# EAGLE board schematic (EAGLE 8.6.0)
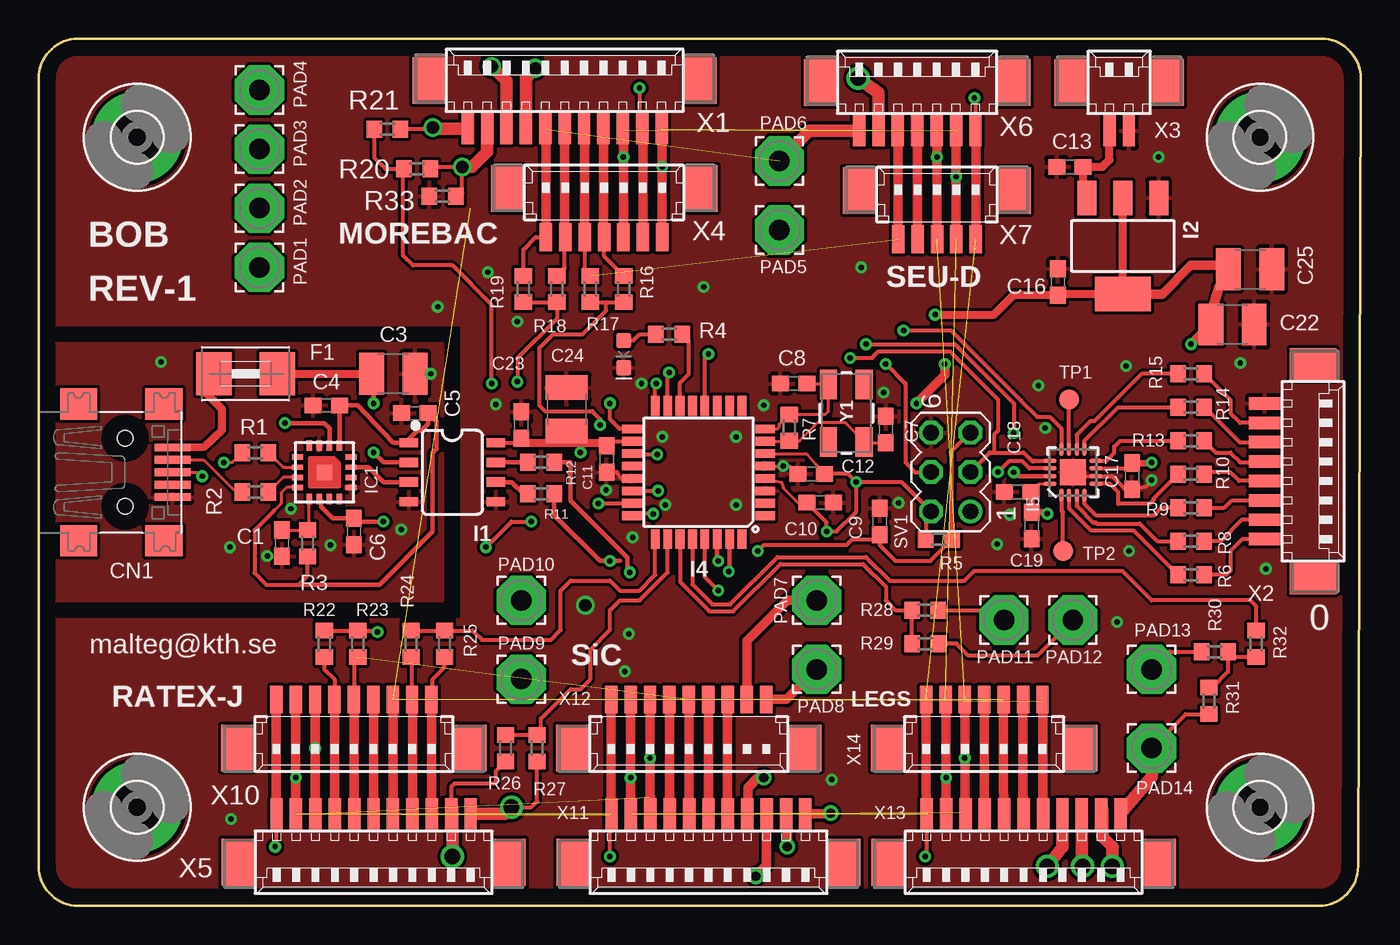
[diagram p0: board, top side]
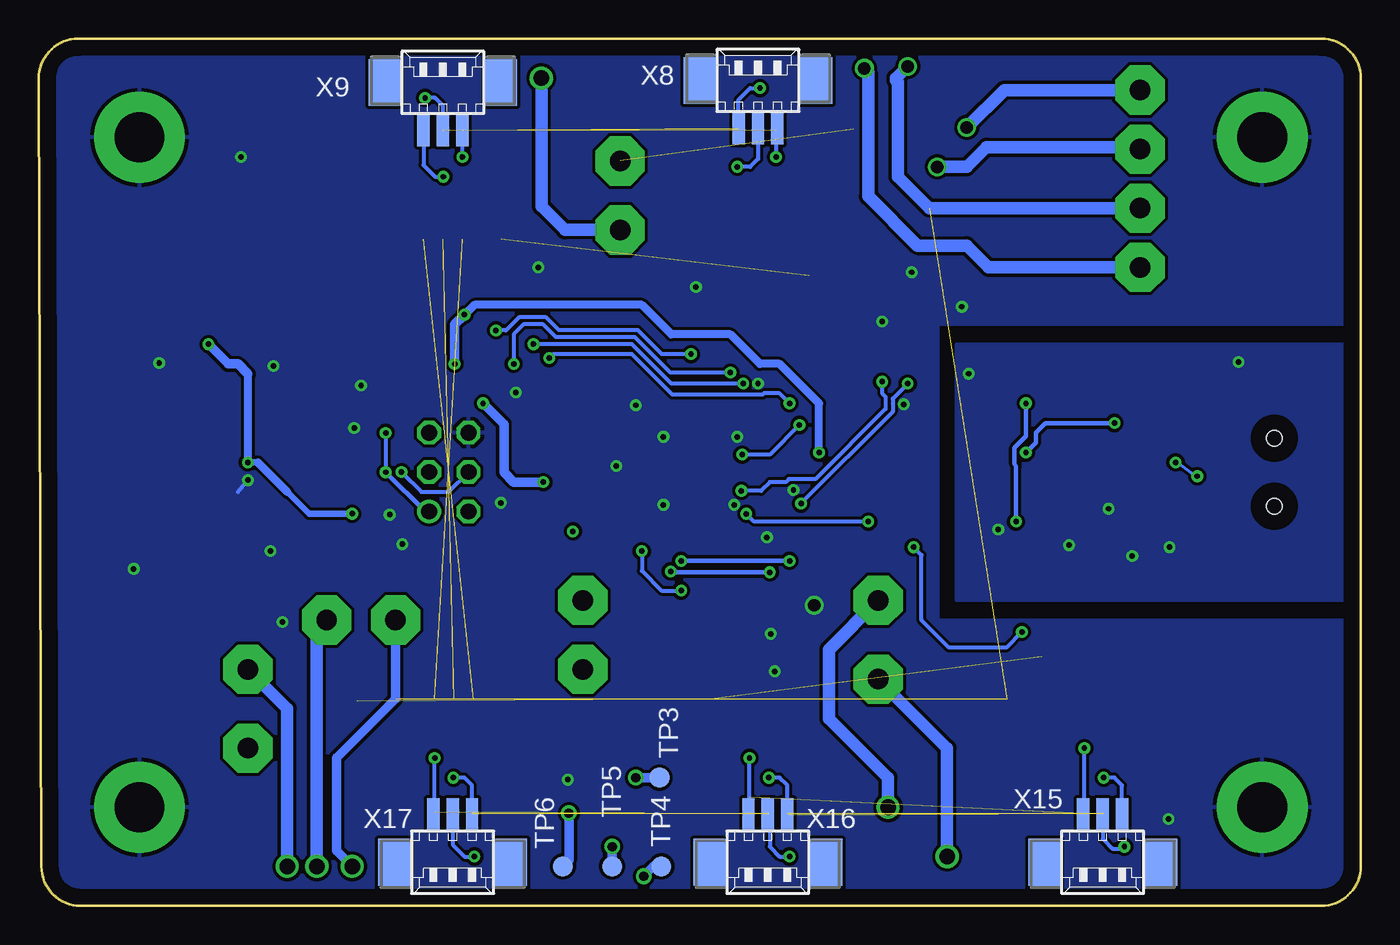
[diagram p1: board, bottom side, seen from below]

Size 85.24 x 55.88 mm. Coordinates in mm from the lower left corner, seen from the top.
Outline: 85.23,53.33 85.07,2.53 arc-90 82.53,0 2.54,0 arc-90 0,2.54 0,53.34 arc-90 2.54,55.88 82.69,55.88 arc-90 85.23,53.33
Copper layers (1*16): Top 0.035mm / dielectric 1.5mm / Bottom 0.035mm
Design rules "default *": minimum track width 7mil, minimum drill 12mil, track to track 8mil, track to pad 8mil, pad to pad 8mil, via to via 8mil, smd to smd 8mil, copper to edge 40mil, drill to drill 8mil, minimum pad ring 10mil, minimum via ring 8mil, stop-mask expansion 4mil, vias tented up to drill 0.6mm, thermal gap 10mil

## Footprints (pad centres in the part's own frame; a part is rotated, then mirrored left to right if it is on the bottom)
C0603 = smd 1.1 x 1: 1 -0.85,0; 2 0.85,0
C3225 = smd 1.6 x 2.7: 1 -1.4,0; 2 1.4,0
USB-MINIB = smd 0.5 x 2.308: D+ 0,4.064; D- -0.8,4.064; GND 1.6,4.064; ID 0.8,4.064; VBUS -1.6,4.064 | smd 2 x 2.4: GND1 -4.4,-2; GND2 -4.4,3.5; GND3 4.4,3.5; GND4 4.4,-2 | hole 1: -2.2,1; 2.2,1
LED-0603 = smd 1 x 1: A -0.877,0; C 0.877,0
1812 = smd 2.286 x 2.794: 1 -2.046,0; 2 2.046,0
3,2-PAD = drill 3.2 pad 5.842: B3,2 0,0
SO08 = smd 0.6 x 1.2: 1 -1.905,-2.8; 2 -0.635,-2.8; 3 0.635,-2.8; 4 1.905,-2.8; 5 1.905,2.8; 6 0.635,2.8; 7 -0.635,2.8; 8 -1.905,2.8
SOT223 = smd 1.219 x 2.235: 1 -2.311,-3.099; 2 0,-3.099; 3 2.311,-3.099 | smd 3.6 x 2.2: 2*2 0,3.099
TQFP32-08 = smd 1.27 x 0.559: 1 -4.293,2.8; 2 -4.293,2; 3 -4.293,1.2; 4 -4.293,0.4; 5 -4.293,-0.4; 6 -4.293,-1.2; 7 -4.293,-2; 8 -4.293,-2.8; 17 4.293,-2.8; 18 4.293,-2; 19 4.293,-1.2; 20 4.293,-0.4; 21 4.293,0.4; 22 4.293,1.2; 23 4.293,2; 24 4.293,2.8 | smd 0.559 x 1.27: 9 -2.8,-4.293; 10 -2,-4.293; 11 -1.2,-4.293; 12 -0.4,-4.293; 13 0.4,-4.293; 14 1.2,-4.293; 15 2,-4.293; 16 2.8,-4.293; 25 2.8,4.293; 26 2,4.293; 27 1.2,4.293; 28 0.4,4.293; 29 -0.4,4.293; 30 -1.2,4.293; 31 -2,4.293; 32 -2.8,4.293
QFN16-3X3MM = smd 0.85 x 0.28: 1 -1.475,0.75; 2 -1.475,0.25; 3 -1.475,-0.25; 4 -1.475,-0.75; 9 1.475,-0.75; 10 1.475,-0.25; 11 1.475,0.25; 12 1.475,0.75 | smd 0.28 x 0.85: 5 -0.75,-1.475; 6 -0.25,-1.475; 7 0.25,-1.475; 8 0.75,-1.475; 13 0.75,1.475; 14 0.25,1.475; 15 -0.25,1.475; 16 -0.75,1.475 | smd 1.68 x 1.68: EXT 0,0
QFN16 = smd 0.7 x 0.35: 1 -1.725,0.975; 2 -1.725,0.325; 3 -1.725,-0.325; 4 -1.725,-0.975; 9 1.725,-0.975; 10 1.725,-0.325; 11 1.725,0.325; 12 1.725,0.975 | smd 0.35 x 0.7: 5 -0.975,-1.725; 6 -0.325,-1.725; 7 0.325,-1.725; 8 0.975,-1.725; 13 0.975,1.725; 14 0.325,1.725; 15 -0.325,1.725; 16 -0.975,1.725 | smd 1 x 1: TAB 0,0
3,17/1,3 = drill 1.321 pad 3.175 octagon: 1 0,0
R0603 = smd 1 x 1.1: 1 -0.85,0; 2 0.85,0
MA03-2 = drill 1.016: 1 -2.54,-1.27 | drill 1.016 octagon: 2 -2.54,1.27; 3 0,-1.27; 4 0,1.27; 5 2.54,-1.27; 6 2.54,1.27
TP13R = smd 1.3 x 1.3: TP 0,0
53261-11 = smd 0.8 x 2: 1 6.25,-2.5; 2 5,-2.5; 3 3.75,-2.5; 4 2.5,-2.5; 5 1.25,-2.5; 6 0,-2.5; 7 -1.25,-2.5; 8 -2.5,-2.5; 9 -3.75,-2.5; 10 -5,-2.5; 11 -6.25,-2.5 | smd 2.1 x 3: S1 8.75,0.625; S2 -8.75,0.625
53261-08 = smd 0.8 x 2: 1 4.375,-2.5; 2 3.125,-2.5; 3 1.875,-2.5; 4 0.625,-2.5; 5 -0.625,-2.5; 6 -1.875,-2.5; 7 -3.125,-2.5; 8 -4.375,-2.5 | smd 2.1 x 3: S1 6.875,0.625; S2 -6.875,0.625
53261-02 = smd 0.8 x 2: 1 0.625,-2.5; 2 -0.625,-2.5 | smd 2.1 x 3: S1 3.125,0.625; S2 -3.125,0.625
53398-07 = smd 0.8 x 1.8: 1 3.75,-2.5; 2 2.5,-2.5; 3 1.25,-2.5; 4 0,-2.5; 5 -1.25,-2.5; 6 -2.5,-2.5; 7 -3.75,-2.5 | smd 2.1 x 3: S1 6.25,0.625; S2 -6.25,0.625
53261-07 = smd 0.8 x 2: 1 3.75,-2.5; 2 2.5,-2.5; 3 1.25,-2.5; 4 0,-2.5; 5 -1.25,-2.5; 6 -2.5,-2.5; 7 -3.75,-2.5 | smd 2.1 x 3: S1 6.25,0.625; S2 -6.25,0.625
53398-05 = smd 0.8 x 1.8: 1 2.5,-2.5; 2 1.25,-2.5; 3 0,-2.5; 4 -1.25,-2.5; 5 -2.5,-2.5 | smd 2.1 x 3: S1 5,0.625; S2 -5,0.625
53261-03 = smd 0.8 x 2: 1 1.25,-2.5; 2 0,-2.5; 3 -1.25,-2.5 | smd 2.1 x 3: S1 3.75,0.625; S2 -3.75,0.625
53398-09 = smd 0.8 x 1.8: 1 5,-2.5; 2 3.75,-2.5; 3 2.5,-2.5; 4 1.25,-2.5; 5 0,-2.5; 6 -1.25,-2.5; 7 -2.5,-2.5; 8 -3.75,-2.5; 9 -5,-2.5 | smd 2.1 x 3: S1 7.5,0.625; S2 -7.5,0.625
CRYSTAL-SMD-5X3.2-4PAD = smd 1.9 x 1.1: 1 -1.85,-1.15; 2 1.85,-1.15; 3 1.85,1.15; 4 -1.85,1.15

## Placement (x,y rotation side)
C1  [C0603]  15.68,23.37 270 top
C3  1u  [C3225]  22.86,34.29 0 top
C4  100n  [C0603]  18.54,32.26 180 top
C5  1u  [C0603]  24.26,31.75 180 top
C6  10n  [C0603]  20.32,24.13 270 top
C7  22pF  [C0603]  54.61,30.7 270 top
C8  22pF  [C0603]  48.68,33.66 0 top
C9  [C0603]  54.23,24.77 90 top
C10  [C0603]  50.38,25.98 0 top
C11  [C0603]  36.62,28.8 270 top
C12  [C0603]  49.81,27.84 180 top
C13  [C0603]  66.48,47.62 180 top
C16  [C0603]  65.71,40.2 90 top
C17  [C0603]  70.48,27.69 270 top
C18  [C0603]  63.12,26.67 180 top
C19  [C0603]  64.01,24.51 270 top
C22  1u  [C3225]  76.96,37.47 0 top
C23  [C0603]  31.11,30.99 90 top
C24  1u  [C3225]  34.04,32 90 top
C25  1u  [C3225]  78.11,41.02 0 top
CN1  [USB-MINIB]  4.57,27.94 270 top
D1  [LED-0603]  37.72,35.56 270 top
F1  [1812]  13.34,34.29 0 top
H1  MOUNT-PAD-ROUND3.2  [3,2-PAD]  78.74,49.53 0 top
H2  MOUNT-PAD-ROUND3.2  [3,2-PAD]  6.35,6.35 0 top
H3  MOUNT-PAD-ROUND3.2  [3,2-PAD]  6.35,49.53 0 top
H4  MOUNT-PAD-ROUND3.2  [3,2-PAD]  78.74,6.35 0 top
I1  ADUM1201ARZ  [SO08]  26.67,27.94 270 top
I2  LDL1117S33R  [SOT223]  69.9,42.53 180 top
I4  ATMEGA328PCORRECT  [TQFP32-08]  42.55,27.94 180 top
I5  DAC70508MRTET  [QFN16-3X3MM]  66.67,27.94 90 top
IC1  FT230XQ  [QFN16]  18.41,27.94 270 top
PAD1  [3,17/1,3]  14.22,41.15 0 top
PAD2  [3,17/1,3]  14.22,44.96 0 top
PAD3  [3,17/1,3]  14.22,48.77 0 top
PAD4  [3,17/1,3]  14.22,52.58 0 top
PAD5  [3,17/1,3]  47.75,43.56 0 top
PAD6  [3,17/1,3]  47.75,48.01 0 top
PAD7  [3,17/1,3]  50.16,19.68 0 top
PAD8  [3,17/1,3]  50.16,15.24 0 top
PAD9  [3,17/1,3]  31.11,14.61 0 top
PAD10  [3,17/1,3]  31.11,19.68 0 top
PAD11  [3,17/1,3]  62.23,18.41 0 top
PAD12  [3,17/1,3]  66.67,18.41 0 top
PAD13  [3,17/1,3]  71.75,15.24 0 top
PAD14  [3,17/1,3]  71.75,10.16 0 top
R1  27  [R0603]  13.97,29.21 0 top
R2  27  [R0603]  13.97,26.67 0 top
R3  27  [R0603]  17.34,23.37 270 top
R4  27  [R0603]  40.64,36.83 0 top
R5  27  [R0603]  58.04,23.62 180 top
R6  27  [R0603]  74.3,21.34 180 top
R7  27  [R0603]  48.39,30.82 270 top
R8  27  [R0603]  74.3,23.5 180 top
R9  27  [R0603]  74.3,25.65 180 top
R10  27  [R0603]  74.3,27.81 180 top
R11  1k  [R0603]  32.38,26.54 0 top
R12  1k  [R0603]  32.38,28.57 0 top
R13  27  [R0603]  74.3,29.97 180 top
R14  27  [R0603]  74.3,32.13 180 top
R15  27  [R0603]  74.3,34.29 180 top
R16  1k  [R0603]  37.72,39.75 90 top
R17  1k  [R0603]  35.56,39.75 90 top
R18  1k  [R0603]  33.4,39.75 90 top
R19  1k  [R0603]  31.24,39.75 90 top
R20  1k  [R0603]  24.38,47.5 0 top
R21  1k  [R0603]  22.48,50.04 0 top
R22  1k  [R0603]  18.41,16.89 270 top
R23  1k  [R0603]  20.57,16.89 270 top
R24  1k  [R0603]  24,16.89 270 top
R25  1k  [R0603]  26.16,16.89 270 top
R26  1k  [R0603]  30.1,10.16 270 top
R27  1k  [R0603]  32.13,10.16 270 top
R28  1k  [R0603]  57.15,19.05 0 top
R29  1k  [R0603]  57.15,16.89 0 top
R30  1k  [R0603]  75.82,16.38 180 top
R31  1k  [R0603]  75.44,13.21 270 top
R32  1k  [R0603]  78.49,16.89 270 top
R33  1k  [R0603]  26.04,45.72 180 top
SV1  [MA03-2]  58.8,27.95 90 top
TP1  TPTP13R  [TP13R]  66.42,32.64 0 top
TP2  TPTP13R  [TP13R]  66.04,22.86 0 top
TP3  TPTP13R  [TP13R]  45.21,8.26 0 bottom
TP4  TPTP13R  [TP13R]  45.09,2.54 0 bottom
TP5  TPTP13R  [TP13R]  48.26,2.54 0 bottom
TP6  TPTP13R  [TP13R]  51.44,2.54 0 bottom
X1  53261-11  [53261-11]  33.91,52.58 0 top
X2  53261-08  [53261-08]  81.53,28 270 top
X3  53261-02  [53261-02]  69.66,52.45 0 top
X4  53398-07  [53398-07]  36.45,45.59 0 top
X5  53261-11  [53261-11]  21.59,3.43 180 top
X6  53261-07  [53261-07]  56.64,52.45 0 top
X7  53398-05  [53398-05]  57.91,45.47 0 top
X8  53261-03  [53261-03]  38.86,52.58 0 bottom
X9  53261-03  [53261-03]  59.18,52.45 0 bottom
X10  53398-09  [53398-09]  20.32,10.79 180 top
X11  53261-11  [53261-11]  43.18,3.43 180 top
X12  53398-09  [53398-09]  41.91,10.79 180 top
X13  53261-11  [53261-11]  63.5,3.43 180 top
X14  53398-07  [53398-07]  60.96,10.79 180 top
X15  53261-03  [53261-03]  16.64,3.43 180 bottom
X16  53261-03  [53261-03]  38.23,3.43 180 bottom
X17  53261-03  [53261-03]  58.55,3.43 180 bottom
Y1  16MHz  [CRYSTAL-SMD-5X3.2-4PAD]  52.07,31.75 270 top

## Library data of the parts
C1 C3-C13 C16-C19 C22-C25 = rcl; SPICEPREFIX: C
CN1 F1 = adafruit
D1 = SparkFun-LED
H1-H4 = holes
I1 I2 I4 I5 = MIST_libraries
IC1 = ftdichip
PAD1-PAD14 = wirepad
R1-R33 = resistor
SV1 = con-lstb; OC_FARNELL: unknown; OC_NEWARK: unknown
TP1-TP6 = testpad
X1 X5 X11 X13 = con-molex; MF: MOLEX; MPN: 53261-1171; OC_FARNELL: 1756926; OC_NEWARK: 58K8238
X2 = con-molex; MF: MOLEX; OC_FARNELL: 1125376; OC_NEWARK: unknown
X3 = con-molex; MF: MOLEX; OC_FARNELL: 1125373; OC_NEWARK: unknown
X4 X14 = con-molex; MF: MOLEX; OC_FARNELL: 9786368; OC_NEWARK: unknown
X6 = con-molex; MF: MOLEX; OC_FARNELL: 1125361; OC_NEWARK: unknown
X7 = con-molex; MF: MOLEX; OC_FARNELL: 1125354; OC_NEWARK: unknown
X8 X9 X15-X17 = con-molex; MF: MOLEX; MPN: 53261-0390; OC_FARNELL: 1125359; OC_NEWARK: 57H5006
X10 X12 = con-molex; MF: MOLEX; OC_FARNELL: unknown; OC_NEWARK: unknown
Y1 = SparkFun-Clocks; PROD_ID: XTAL-08218; SF_ID: COM-00094

## Nets
3V3CUBES: R23.2 X5.5 X10.5 X11.5 X12.5 X13.5 X14.5
3V3CUBES_DIV: I4.24 R22.1 R23.1
3V3SEUD: PAD6.1 R19.2 X1.7 X4.7 X6.7
3V3SEUD_DIV: I4.22 R18.1 R19.1
5V_LEGS: TP4.TP X11.9
5V_LEGS_DIV: I4.27 R28.1 R29.1
5VMORE: PAD4.1 R21.2 X1.11
5VMORE_DIV: I4.23 R20.1 R21.1
5VRATEX: PAD10.1 R27.2 X5.11
5VRATEX_DIV: I4.26 R26.1 R27.1
5VSIC: R25.2 X5.9 X10.9
5VSIC_DIV: I4.25 R24.1 R25.1
48VLEGS: TP6.TP X11.11
48VLEGS_DIV: I4.28 R32.1
48VLEGS_DIV_D: R30.1 R31.1 R32.2
BATTERY: C13.1 I2.3 X3.2
CRYSTAL_0: C7.2 I4.7 R7.2 Y1.3
CRYSTAL_1: C8.2 I4.8 R7.1 Y1.1
CS_DAC: I4.12 I5.12
DSFGSDFG: X13.4 X14.4
GND: C7.1 C8.1 C9.2 C10.2 C11.2 C12.2 C13.2 C16.2 C17.2 C18.2 C19.2 C22.2 C23.2 C24.2 C25.2 D1.C H1.B3,2 H2.B3,2 H3.B3,2 H4.B3,2 I1.5 I2.1 I4.3 I4.5 I4.21 I5.6 I5.EXT R33.2 SV1.6 X2.8 X3.1
GND_I2C_STACK: X1.2 X4.2 X5.2 X6.2 X7.2 X8.3 X9.3 X10.2 X11.2 X12.2 X13.2 X14.2 X15.3 X16.3 X17.3
GND_USB: C1.2 C3.2 C4.2 C5.2 C6.2 CN1.GND I1.4 IC1.3 IC1.13
LED: I4.14 R4.2
MISO: I4.16 I5.15 SV1.1
MOSI: I4.15 I5.14 SV1.4
N$1: CN1.D- R2.1
N$2: CN1.D+ R1.1
N$3: IC1.7 R2.2
N$4: I5.1 TP2.TP
N$5: C4.1 C5.1 I1.1 IC1.1 IC1.8 R3.2
N$6: IC1.6 R1.2
N$8: D1.A R4.1
N$9: I5.2 R6.2
N$10: PAD7.1 X12.8
N$11: TP3.TP X11.8
N$12: X6.4 X7.4
N$13: PAD8.1 X12.9
N$14: PAD5.1 X6.6
N$19: R16.2 X1.4 X4.4
N$21: R18.2 X1.6 X4.6
N$23: PAD1.1 X1.8
N$24: I5.3 R8.2
N$26: I5.4 R9.2
N$27: I5.5 R10.2
N$28: I5.8 R13.2
N$29: PAD3.1 R20.2 R33.1 X1.10
N$34: R22.2 X5.4 X10.4
N$36: X5.6 X10.6
N$37: I5.9 R14.2
N$38: I5.10 R15.2
N$39: R15.1 X2.7
N$42: PAD9.1 R26.2 X5.10
N$43: TP5.TP X11.10
N$45: PAD11.1 R28.2 X13.8
N$46: PAD12.1 R29.2 X13.9
N$47: PAD13.1 R30.2 X13.10
N$48: PAD14.1 R31.2 X13.11
N$49: R14.1 X2.6
N$50: R24.2 X5.8 X10.8
N$52: R13.1 X2.5
N$53: R10.1 X2.4
N$54: R9.1 X2.3
N$55: R8.1 X2.2
N$56: R6.1 X2.1
N$57: X13.6 X14.6
N$62: X11.4 X12.4
N$64: X11.6 X12.6
N$68: I5.11 TP1.TP
NANOPROP: R17.2 X1.5 X4.5 X6.5 X7.5
NANOPROP_DIV: I4.19 R16.1 R17.1
RESET: C9.1 I4.29 R5.1 SV1.5
RESET_UART: C1.1 IC1.9 R3.1
RX: I4.30 R11.2
SCK: I4.17 I5.13 SV1.3
SCL: X1.1 X4.1 X5.1 X6.1 X7.1 X8.2 X9.2 X10.1 X11.1 X12.1 X13.1 X14.1 X15.2 X16.2 X17.2
SDA: X1.3 X4.3 X5.3 X6.3 X7.3 X8.1 X9.1 X10.3 X11.3 X12.3 X13.3 X14.3 X15.1 X16.1 X17.1
TX: I4.31 R12.2
TX_USB_SIDE: I1.3 IC1.15
URX_0: I1.6 R11.1
URX_USB_SIDE: I1.2 IC1.2
USB_VDD_FILTERED: C3.1 C6.1 F1.2 IC1.10
USB_VDD_RAW: CN1.VBUS F1.1
UTX_0: I1.7 R12.1
VBAT: PAD2.1 X1.9 X5.7 X10.7 X11.7 X12.7 X13.7 X14.7
VDD_3V3: C10.1 C11.1 C12.1 C16.1 C17.1 C18.1 C19.1 C22.1 C23.1 C24.1 C25.1 I1.8 I2.2 I2.2*2 I4.4 I4.6 I4.18 I5.7 I5.16 R5.2 SV1.2

## Tracks (layer width: path | path; a pad name or v marks a point on that pad's centre or on a via)
3V3CUBES  (2 unrouted)
  Top 0.254: R23.2 20.32,16.04 X10.5
  Top 0.61: X10.5 20.34,12 X5.5 | X12.5 41.91,7.6 X11.5 | X14.5 62.21,7.62 X13.5
3V3CUBES_DIV  (via drill 0.35)
  Top 0.254: R22.1 R23.1 21.76,17.74 v21.84,17.65 | v39.61,25.26 38.37,25.26 I4.24 | v28.83,23.11 30.48,24.77 v31.75,24.77
  Bottom 0.254: v31.75,24.77 39.12,24.77 v39.61,25.26 | v21.84,17.65 22.86,16.64 26.54,16.64 28.32,18.41 28.32,22.61 v28.83,23.11
3V3SEUD  (1 unrouted)
  Top 0.254: R19.2 31.24,42.29 32.04,43.09 X4.7
  Top 0.61: X4.7 32.7,50.04 X1.7
  Top 0.813: X6.7 49.7,49.95 PAD6.1
3V3SEUD_DIV  (via drill 0.35)
  Top 0.254: I4.22 v39.92,26.74 v39.93,26.75 | v30.86,33.78 30.86,35.31 33.4,37.85 R18.1 R19.1
  Bottom 0.254: v39.93,26.75 38.66,26.75 38.1,27.3 37.07,27.3 36.87,27.5 35.16,27.5 30.63,32.03 30.63,32.8 30.86,33.04 v30.86,33.78
5V_LEGS  (via drill 0.6)
  Top 0.61: X11.9 46.93,2.61 v46.23,1.91
  Bottom 0.61: v46.23,1.91 45.59,2.54 TP4.TP
5V_LEGS_DIV
  Top 0.254: R29.1 R28.1 55.24,19.05 54.61,19.68 54.61,20.56 53.15,22.02 47.81,22.02 44.77,18.97 43.24,18.97 41.34,20.87 I4.27
5VMORE  (via drill 0.8)
  Top 0.254: R21.2 23.37,50.08 25.49,50.08
  Top 0.813: v25.4,50.17 25.49,50.08 X1.11
  Bottom 0.813: PAD4.1 22.99,52.58 v25.4,50.17
5VMORE_DIV  (via drill 0.35)
  Top 0.254: v36.09,25.93 38.24,25.93 I4.23 | R21.1 21.63,48.22 22.35,47.5 23.5,47.5 | 23.5,47.5 R20.1 | v29.21,33.66 29.21,38.74 26.67,41.28 24.13,41.28 23.5,41.91 23.5,47.5
  Bottom 0.254: v36.09,25.93 30.17,31.84 30.17,32.38 30.17,32.62 30.17,32.69 v29.21,33.66
5VRATEX  (via drill 1)
  Top 0.254: v30.48,6.35 31.75,6.35 32.13,6.73 R27.2
  Top 0.813: X5.11 30.06,5.93 v30.48,6.35 30.44,6.31
  Bottom 0.813: v30.48,6.35 30.48,8.26 34.29,12.06 34.29,16.51 PAD10.1
5VRATEX_DIV
  Top 0.254: R26.1 R27.1 32.38,11.26 32.38,12.06 34.29,13.97 34.92,13.97 35.56,14.61 35.56,16.51 36.83,17.78 36.83,19.05 37.47,19.68 38.75,19.68 40.55,21.48 I4.26
5VSIC
  Top 0.254: X10.9 25.4,13.38 25.4,14.61 26.16,15.37 R25.2
  Top 0.61: X10.9 25.32,7.6 X5.9
5VSIC_DIV
  Top 0.254: R24.1 R25.1 27.98,17.74 28.57,17.14 33.02,17.14 33.66,17.78 33.66,20.32 34.29,20.95 36.83,20.95 37.47,20.32 38.73,20.32 39.74,21.33 I4.25
48VLEGS  (via drill 0.6)
  Top 0.61: X11.11 51.01,5.93 v51.05,5.97
  Bottom 0.61: v51.05,5.97 51.05,2.92 TP6.TP
48VLEGS_DIV
  Top 0.254: R32.1 78.49,19.3 78.11,19.68 71.75,19.68 69.85,21.59 60.33,21.59 59.69,20.95 54.86,20.95 53.34,22.48 47.62,22.48 44.58,19.43 43.43,19.43 42.15,20.72 I4.28
48VLEGS_DIV_D
  Top 0.254: R31.1 75.65,14.06 76.67,15.07 R30.1 77.01,16.04 R32.2
BATTERY
  Top 0.508: I2.3 67.33,45.88 C13.1 68.58,47.62 69.03,48.08 X3.2
CRYSTAL_0
  Top 0.203: I4.7 48.35,29.94 R7.2 49.06,29.97 50.24,31.16 51.97,31.16 Y1.3 53.27,29.84 C7.2
CRYSTAL_1
  Top 0.203: I4.8 47.63,30.74 47.75,30.86 47.75,31.04 R7.1 50.72,31.67 50.92,31.87 Y1.1 50.87,33.66 C8.2
CS_DAC  (via drill 0.35)
  Top 0.254: I4.12 42.95,35.33 v43.18,35.56 | v55.75,37.08 58.81,37.08 63.32,32.57 63.32,32.56 64.38,31.51 65.19,31.51 65.92,30.77 I5.12
  Bottom 0.254: v43.18,35.56 45.06,35.56 46.61,37.11 51.7,37.11 52.52,37.92 54.28,37.92 55.12,37.08 v55.75,37.08
DSFGSDFG
  Top 0.61: X14.4 60.96,7.62 X13.4
GND  (via drill 0.35, 0.8)
  Top 0.2: I5.6 67.18,27.69 66.93,27.94 I5.EXT
  Top 0.203: I4.5 v48.01,28.34 48.46,28.34 C12.2 48.73,27.84
  Top 0.254: I5.6 69.21,27.69 70.06,26.84 C17.2 71.4,27.03 v71.75,27.43 | I4.21 38.06,27.48 37.61,27.48 37.27,27.95 C11.2 | 65.95,28.02 66.04,27.94 I5.EXT
  Bottom 0.254: 72.39,26.67 v71.75,27.43
  other vias: 77.47,34.99 79.12,21.72 61.79,23.3 62.61,25.21 70.1,34.8 72.2,48.26 69.53,18.29 38.86,33.66 40.2,30.23 44.96,30.23 44.96,25.84 40.39,25.84 38.29,23.75 54.48,33.08 35.24,19.37 36.58,26.8 30.86,37.66 29.46,32.32 64.9,30.8 55.44,25.97 28.96,40.83 37.78,15.11 42.86,39.88 53.02,41.15 25.72,38.61 12.38,5.59 51.12,8.13 38.04,17.53 70.29,22.86 64.45,33.53 46.74,32.26
  pour Top: 0,37.47 27.3,37.47 27.3,18.41 -1.91,18.41 -1.91,-0.64 -1.27,-0.64 -1.27,-1.27 87.63,-1.27 87.63,57.79 -1.27,57.79 -1.27,38.74
  pour Bottom: 0,37.47 27.3,37.47 27.3,18.41 -1.91,18.41 -1.91,-0.64 -1.27,-0.64 -1.27,-1.27 87.63,-1.27 87.63,57.79 -1.27,57.79 -1.27,38.74
GND_I2C_STACK  (via drill 0.35)  (4 unrouted)
  Top 0.254: v38.73,52.71 38.73,50.25 38.95,50.04
  Top 0.61: X5.2 16.57,7.6 v16.57,8.26 X10.2 | X11.2 38.16,7.6 v38.16,8.26 X12.2 | X13.2 v58.5,8.26 58.5,13.25 X14.2 | X1.2 38.95,50.04 X4.2 | X6.2 v59.14,46.99 59.14,42.99 X7.2
  Bottom 0.254: X15.3 15.39,7.77 15.88,8.26 v16.57,8.26 | X16.3 36.98,7.77 37.47,8.26 v38.16,8.26 | X17.3 57.3,7.77 57.78,8.26 v58.5,8.26 | X9.3 60.43,47.73 59.69,46.99 v59.14,46.99 | X8.3 40.11,51.96 39.37,52.71 v38.73,52.71
GND_USB  (via drill 0.35)
  other vias: 7.87,35.05 25.27,34.29 16.26,25.59 23.37,24.26 18.8,23.24 12.32,23.11 14.73,22.54
  pour Top: 26.04,36.2 0,36.2 0,19.68 26.04,19.68
  pour Bottom: 0,19.68 26.04,19.68 26.04,36.2 0,36.2
LED
  Top 0.254: R4.2 41.91,36.41 41.91,34.29 41.34,33.73 I4.14
MISO  (via drill 0.35)
  Top 0.254: I4.16 39.74,33.58 v39.82,33.66 | v62.87,30.48 62.87,32.38 59.05,36.2 v53.34,36.2
  Top 0.305: I5.15 63.12,27.69 v62.87,27.94
  Bottom 0.254: v39.82,33.66 44.45,33.66 46.99,36.2 v53.34,36.2 | v62.87,30.48 v62.87,27.94
  Bottom 0.305: v62.87,27.94 60.34,25.41 SV1.1
MOSI  (via drill 0.35)
  Top 0.254: I5.14 63.88,28.19 63.43,28.65 62.54,28.65 v61.84,27.96 | I4.15 40.55,34.27 v40.64,34.36 | v54.61,34.93 55.88,33.66 55.88,28.57 56.5,27.95 SV1.4
  Bottom 0.254: v61.84,27.96 60.56,26.67 58.81,26.67 SV1.4 | v40.64,34.36 44.51,34.36 46.8,36.65 51.89,36.65 52.7,37.47 53.98,37.47 54.61,36.83 v54.61,34.93
N$1
  Top 0.203: CN1.D- 10.63,28.74 12.7,26.67 R2.1
N$2  (via drill 0.35)
  Top 0.203: CN1.D+ 10.16,27.94 v10.54,27.69 | v11.94,28.57 12.48,28.57 R1.1
  Bottom 0.203: v10.54,27.69 10.79,27.81 11.81,28.57 v11.94,28.57
N$3
  Top 0.2: IC1.7 15.77,27.61 R2.2
N$4
  Top 0.254: TP2.TP 66.04,25.36 65.95,25.45 65.95,26.43 I5.1
N$5
  Top 0.2: IC1.8 15.98,26.96 15.62,26.61 15.62,25.92 15.16,25.46
  Top 0.254: 15.16,25.46 13.91,24.2 13.91,21.46 14.67,20.7 16.76,20.7 17.34,21.27 R3.2
  Top 0.305: 16.76,20.7 21.97,20.7 25.4,24.13 25.4,29.21 25.65,29.46 25.65,31.24 25.61,31.24 C5.1 25.11,31.08 24.64,30.61 24.38,30.61 23.62,29.84 | IC1.1 19.39,31.62 C4.1 20.57,32.26 22.86,29.84 23.62,29.84 | 23.62,29.84 I1.1
N$6
  Top 0.2: R1.2 15.77,28.27 IC1.6
N$8
  Top 0.254: D1.A 38.34,36.44 38.73,36.83 R4.1
N$9
  Top 0.254: R6.2 70.6,24.18 67.87,24.18 66.45,25.6 66.45,26.43 I5.2
N$10
  Top 0.61: X12.8 45.66,17.09 48.26,19.68 PAD7.1
N$11  (via drill 0.6)
  Top 0.61: X11.8 45.72,5.97 45.72,7.62 46.35,8.26 v46.74,8.26
  Bottom 0.61: v46.74,8.26 TP3.TP
N$12
  Top 0.61: X6.4 56.64,42.99 X7.4
N$13
  Top 0.61: PAD8.1 48.22,13.29 X12.9
N$14  (via drill 1)
  Top 0.813: v52.83,53.34 54.14,52.41 X6.6
  Bottom 0.813: PAD5.1 51.31,43.56 52.83,45.09 v52.83,53.34
N$19
  Top 0.254: R16.2 36.45,41.87 X4.4 36.41,43.13
  Top 0.61: 36.41,43.13 X1.4
N$21
  Top 0.254: R18.2 33.91,41.11 33.91,43.13
  Top 0.61: X1.6 33.91,43.13 X4.6
N$23  (via drill 0.8)
  Top 0.813: X1.8 31.41,53.38 v32,53.98
  Bottom 0.813: v32,53.98 31.75,53.72 31.75,45.72 28.57,42.55 25.4,42.55 24,41.15 PAD1.1
N$24
  Top 0.254: I5.3 66.92,25.77 68.01,24.69 68.15,24.69 68.2,24.64 70.99,24.64 72.14,23.5 R8.2
N$26
  Top 0.254: R9.2 72.39,25.65 71.88,25.15 68.2,25.15 67.42,25.92 I5.4
N$27
  Top 0.254: R10.2 71.88,26.25 71.88,26.16 71.63,25.91 69.6,25.91 69.6,26.66 69.06,27.19 I5.5
N$28
  Top 0.254: I5.8 68.82,28.69 69.34,29.21 69.34,29.59 69.72,29.97 R13.2
N$29  (via drill 0.8)
  Top 0.254: R20.2 25.36,47.62 v27.3,47.62 27.3,45.94 27.1,45.94 R33.1
  Top 0.813: X1.10 28.91,48.59 27.94,47.62 v27.3,47.62
  Bottom 0.813: v27.3,47.62 25.4,47.62 24.13,48.9 14.35,48.9 PAD3.1
N$34
  Top 0.254: R22.2 18.41,15.24 19.07,14.58 X10.4
  Top 0.61: X5.4 19.07,7.6 X10.4
N$36
  Top 0.61: X10.6 21.59,12 X5.6 21.59,6.98
N$37
  Top 0.254: I5.9 67.42,29.96 69.6,32.13 R14.2
N$38
  Top 0.254: R15.2 71.11,34.29 68.06,31.24 67.82,31.24 66.92,30.35 I5.10
N$39
  Top 0.254: R15.1 76.83,32.6 76.83,31.75 77.46,31.13 X2.7
N$42  (via drill 1)
  Top 0.254: R26.2 29.46,8.68 29.46,7.87 26.8,7.87 26.59,7.67 X5.10
  Top 0.813: X5.10 26.67,6.23 v26.67,3.17
  Bottom 0.813: v26.67,3.17 26.67,10.16 PAD9.1
N$43  (via drill 0.6)
  Top 0.61: X11.10 48.26,5.85 v48.26,3.81
  Bottom 0.61: v48.26,3.81 TP5.TP
N$45  (via drill 1)
  Top 0.254: PAD11.1 61.59,19.05 R28.2
  Top 0.813: X13.8 66,3.77 v65.02,2.54
  Bottom 0.61: v65.02,2.54 66.04,3.56 66.04,9.53 62.23,13.33 PAD11.1
N$46  (via drill 1)
  Top 0.254: PAD12.1 64.39,16.13 59.94,16.13 59.18,16.89 R29.2
  Top 0.813: X13.9 67.25,2.6 v67.31,2.54
  Bottom 0.813: v67.31,2.54 67.31,17.78 PAD12.1
N$47  (via drill 1)
  Top 0.254: PAD13.1 72.9,16.38 R30.2
  Top 0.813: X13.10 68.58,6.23 68.58,4.45 69.22,3.81 v69.22,2.54
  Bottom 0.813: v69.22,2.54 69.22,12.7 PAD13.1
N$48
  Top 0.254: PAD14.1 73.95,12.36 R31.2
  Top 0.813: X13.11 71.75,8.31 PAD14.1
N$49
  Top 0.254: X2.6 79,29.84 77.47,29.84 75.18,32.13 R14.1
N$50
  Top 0.254: X10.8 24.07,16.23 R24.2
  Top 0.61: X5.8 24.09,12 X10.8
N$52
  Top 0.254: R13.1 75.91,29.21 76.83,29.21 77.47,28.57 79.38,28.57 79.32,28.63 X2.5
N$53
  Top 0.254: X2.4 77.4,27.38 76.83,27.94 75.27,27.94 R10.1
N$54
  Top 0.254: R9.1 76.45,25.65 76.93,26.13 X2.3
N$55
  Top 0.254: X2.2 77.58,24.88 76.2,23.5 R8.1
N$56
  Top 0.254: X2.1 77.6,23.63 76.83,22.86 76.83,21.59 76.58,21.34 R6.1
N$57
  Top 0.61: X14.6 63.46,7.03 63.5,6.98 X13.6
N$62
  Top 0.61: X11.4 40.68,13.28 X12.4
N$64
  Top 0.61: X11.6 43.18,12.64 X12.6
N$68
  Top 0.254: I5.11 66.42,32.77 | 66.42,32.77 66.67,33.02 | 66.42,32.77 TP1.TP
NANOPROP  (1 unrouted)
  Top 0.254: X4.5 35.2,40.96 R17.2
  Top 0.61: X7.5 55.39,42.99 X6.5 | X4.5 35.2,50.04 X1.5
NANOPROP_DIV  (via drill 0.35)
  Top 0.254: R17.1 36.58,38.9 | 36.58,38.9 R16.1 | v36.2,30.99 36.2,31.37 35.69,31.88 32.64,31.88 32.26,32.26 32.26,35.94 33.15,36.83 35.05,36.83 36.58,38.35 36.58,38.9 | v39.88,29.08 38.31,29.08 I4.19
  Bottom 0.254: v36.2,30.99 38.1,29.08 v39.88,29.08
RESET  (via drill 0.35)
  Top 0.254: SV1.5 58.89,29.32 | 58.89,29.32 58.8,29.23 | v46.35,22.86 46.74,23.24 52.07,23.24 52.45,23.62 53.94,23.62 C9.1 54.23,23.24 55.24,22.22 57.49,22.22 R5.1 58.89,29.32 | I4.29 42.95,21.19 v43.81,20.32
  Bottom 0.254: v46.35,22.86 46.35,21.59 45.09,20.32 v43.81,20.32
RESET_UART
  Top 0.2: C1.1 R3.1 17.44,24.32 IC1.9
RX  (via drill 0.35)
  Top 0.305: R11.2 33.23,25.18 36.2,22.22 v36.83,22.22 37.47,22.22 | v43.81,22.22 43.74,22.29 I4.30
  Bottom 0.305: v36.83,22.22 v43.81,22.22
SCK  (via drill 0.35)
  Top 0.254: I5.13 64.18,28.69 64.14,28.65 64.07,28.65 63.51,29.21 61.59,29.21 | SV1.3 61.32,29.21 61.59,29.21 | I4.17 37.46,30.74 36.83,31.37 v36.83,32.38 | v52.32,35.31 53.72,35.31 54.15,35.74 58.75,35.74 61.85,32.64 61.85,30.61 61.59,30.35 61.59,29.21
  Bottom 0.254: v36.83,32.38 37.47,33.02 38.49,33.02 38.57,32.95 44.39,32.95 47,35.55 52.08,35.55 v52.32,35.31
SCL  (via drill 0.35)  (4 unrouted)
  Top 0.254: v15.24,3.81 15.34,3.91 X5.1 | v36.83,3.17 36.83,5.83 X11.1 | v57.15,3.17 57.25,3.27 X13.1 | v60.33,52.07 60.39,52 X6.1
  Top 0.61: X14.1 57.21,7.62 X13.1 | X6.1 60.41,49.93 X7.1 | X5.1 15.32,7.6 X10.1 | X12.1 36.91,7.6 X11.1 | X1.1 40.2,50.04 v40.2,47.62 X4.1
  Bottom 0.254: X15.2 16.64,4.32 16,3.68 15.37,3.68 v15.24,3.81 | X16.2 38.1,5.8 38.1,3.81 37.47,3.17 v36.83,3.17 | X17.2 58.55,3.94 57.78,3.17 v57.15,3.17 | X9.2 59.18,51.56 59.69,52.07 v60.33,52.07 | X8.2 38.86,48.13 39.37,47.62 v40.2,47.62
SDA  (via drill 0.35)  (4 unrouted)
  Top 0.61: X14.3 v59.71,9.53 59.71,7.62 X13.3 | X7.3 v57.91,48.26 57.91,49.93 X6.3 | X5.3 17.82,7.6 v17.82,10.16 X10.3 | X12.3 v39.41,9.53 39.41,7.03 | 39.41,7.03 39.37,6.98 | 39.41,7.03 39.43,7.04 X11.3 | X4.3 v37.7,48.26 37.7,50.04 X1.3
  Bottom 0.254: X15.1 17.82,6 v17.82,10.16 | X16.1 39.41,6 v39.41,9.53 | X17.1 59.71,6.02 v59.71,9.53 | X9.1 57.93,48.28 v57.91,48.26 | X8.1 37.7,49.99 v37.7,48.26
TX  (via drill 0.35)
  Top 0.305: I4.31 44.55,22.53 44.55,21.6 v44.49,21.55 | v38.1,21.49 37.97,21.62 37.97,22.43 34.29,26.12 34.29,28.57 R12.2
  Bottom 0.305: v44.49,21.55 44.17,21.55 44.12,21.49 v38.1,21.49
TX_USB_SIDE
  Top 0.305: IC1.15 21.27,28.27 22.23,27.3 I1.3
URX_0
  Top 0.305: I1.6 30.48,27.3 31.24,26.54 R11.1
URX_USB_SIDE  (via drill 0.35)
  Top 0.305: I1.2 22.23,28.57 v21.59,29.21 | v15.88,31.11 18.41,31.11 18.74,30.79 IC1.2
  Bottom 0.305: v21.59,29.21 20.95,29.84 20.95,30.48 20.32,31.11 v15.88,31.11
USB_VDD_FILTERED  (via drill 0.35)
  Top 0.305: IC1.10 18.21,26.1 18.21,25.72 18.95,24.98 C6.1 20.54,24.77 v22.23,24.77 | v21.59,32.38 21.59,34.29 21.46,34.42 C3.1
  Top 0.508: F1.2 C3.1
  Bottom 0.305: v22.23,24.77 22.23,28.32 22.32,28.48 22.32,29.51 21.59,30.25 v21.59,32.38
USB_VDD_RAW
  Top 0.508: CN1.VBUS 10.67,29.59 11.81,30.67 11.81,32 10.65,33.16 F1.1
UTX_0
  Top 0.305: I1.7 R12.1
VBAT  (via drill 0.8)  (3 unrouted)
  Top 0.254: 64.75,12.06 64.71,12.11 X14.7
  Top 0.61: X5.7 22.84,12 X10.7 | X12.7 44.41,7.6 X11.7 | X13.7 64.75,12.06 64.75,13.13 | 64.75,13.13 64.71,13.17 64.71,12.76 64.77,12.7 64.77,13.11 64.75,13.13
  Top 0.813: v29.21,54.1 30.16,53.15 X1.9
  Bottom 0.813: PAD2.1 27.81,44.96 29.84,46.99 29.84,53.09 29.97,53.21 29.97,53.34 v29.21,54.1
VDD_3V3  (via drill 0.35)
  Top 0.203: I4.6 49.49,29.14 C12.1 | I4.4 47.26,27.41 47.87,27.3 48.01,26.92 48.94,25.98 C10.1 | C18.1 64.05,26.75 64.49,27.19 I5.16
  Top 0.254: I5.7 70.14,28.19 C17.1 | I4.18 36.91,29.94 36.83,29.85 C11.1 36.42,29.85 34.92,29.85 | C10.1 50.8,24.71 v50.8,24.13 51.44,24.13 52.7,25.4 v52.7,27.3 | v52.7,27.3 52.17,27.84 C12.1 | R5.2 57.19,25.08 SV1.2 55.64,27.3 v52.7,27.3 | C24.1 34.29,30.35 34.29,29.85 | I1.8 31.11,29.85 C23.1
  Top 0.305: C24.1 34.79,29.85 34.92,29.85 | 65.79,39.43 C16.1
  Top 0.406: v71.75,28.57 71.72,28.54 C17.1 | 64.05,26.75 64.01,26.71 C19.1 64.94,25.36 v65.02,25.27
  Top 0.508: 31.11,29.85 34.29,29.85 34.92,29.85 36.83,29.85 | 65.79,39.43 I2.2*2 I2.2 | C24.1 34.92,29.71 v34.92,29.21 | v57.78,38.1 61.59,38.1 62.87,39.37 65.69,39.37 C16.1
  Top 0.61: I2.2*2 72.45,39.43 74.3,41.28 76.45,41.28 C25.1 76.07,39.88 75.56,38.1 C22.1 v74.3,36.2 | v56.59,32.38 58.42,34.22 v58.42,34.93
  Bottom 0.406: 71.12,28.57 v71.75,28.57 | v65.02,25.27 67.82,25.27 69.22,26.67
  Bottom 0.508: 69.22,26.67 71.12,28.57 | 71.75,34.26 v71.75,28.57 | v34.92,29.21 34.92,32.38 37.47,34.93 38.73,34.93 40.64,36.83 44.45,36.83 46.35,38.74 57.15,38.74 v57.78,38.1
  Bottom 0.61: v74.3,36.2 73.03,34.93 72.39,34.93 71.75,34.29 71.75,34.26 | v52.7,27.3 54.61,27.3 55.24,27.94 55.24,31.04 v56.59,32.38 | v58.42,34.93 58.42,37.47 v57.78,38.1

## Text on the board
tPlace: ! | MOREBAC | SEU-D | BOB / / REV-1 | 0 | malteg@kth.se | SiC | LEGS | RATEX-J